# Altium PCB CW308T_ATSAML11.PcbDoc
Units mil, origin at the board's own origin, x right, y up, seen from the top; angles counter-clockwise.
Board outline 2055 x 2540 mil, 2 copper layers (Top Layer, Bottom Layer); 12 components, 19 nets, 118 pads, 67 vias.
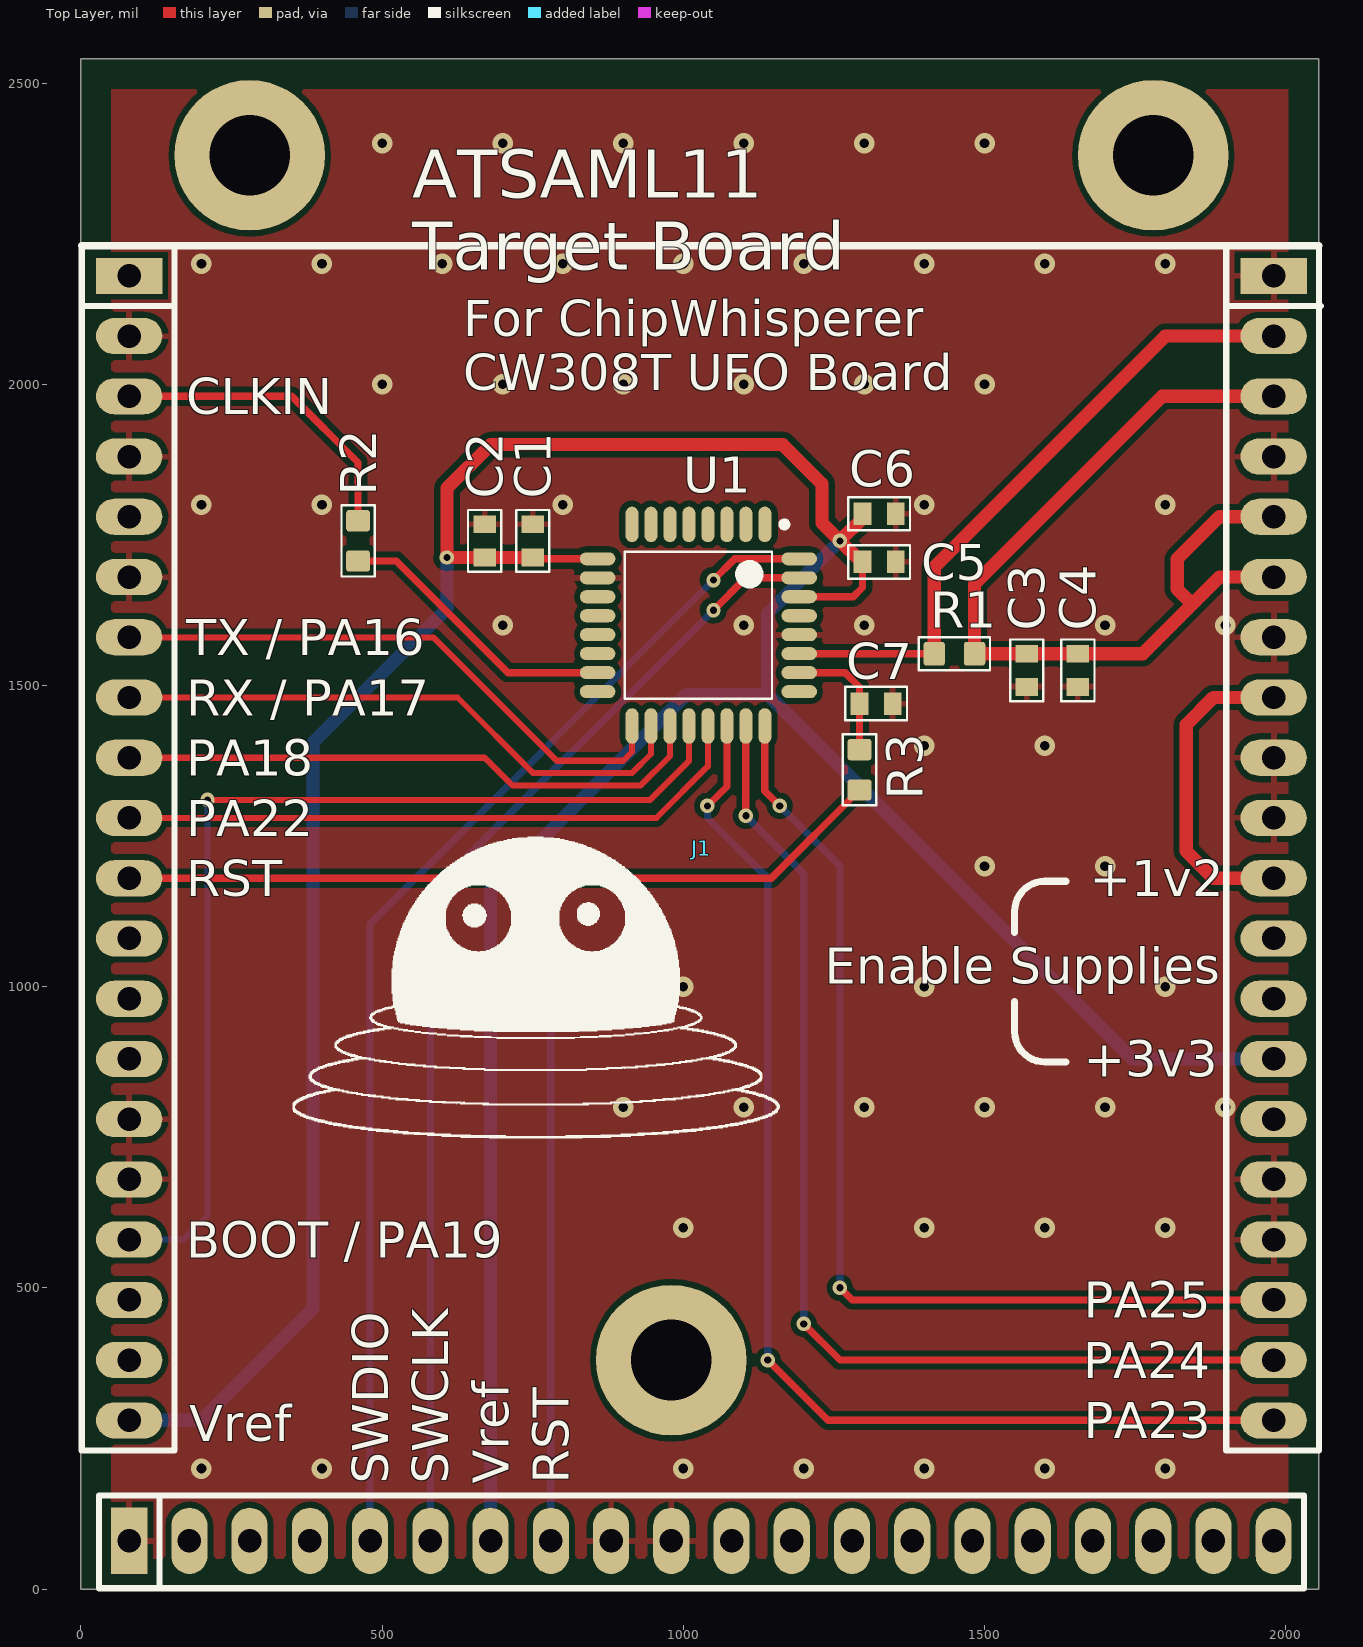
[diagram p0: Top Layer view]
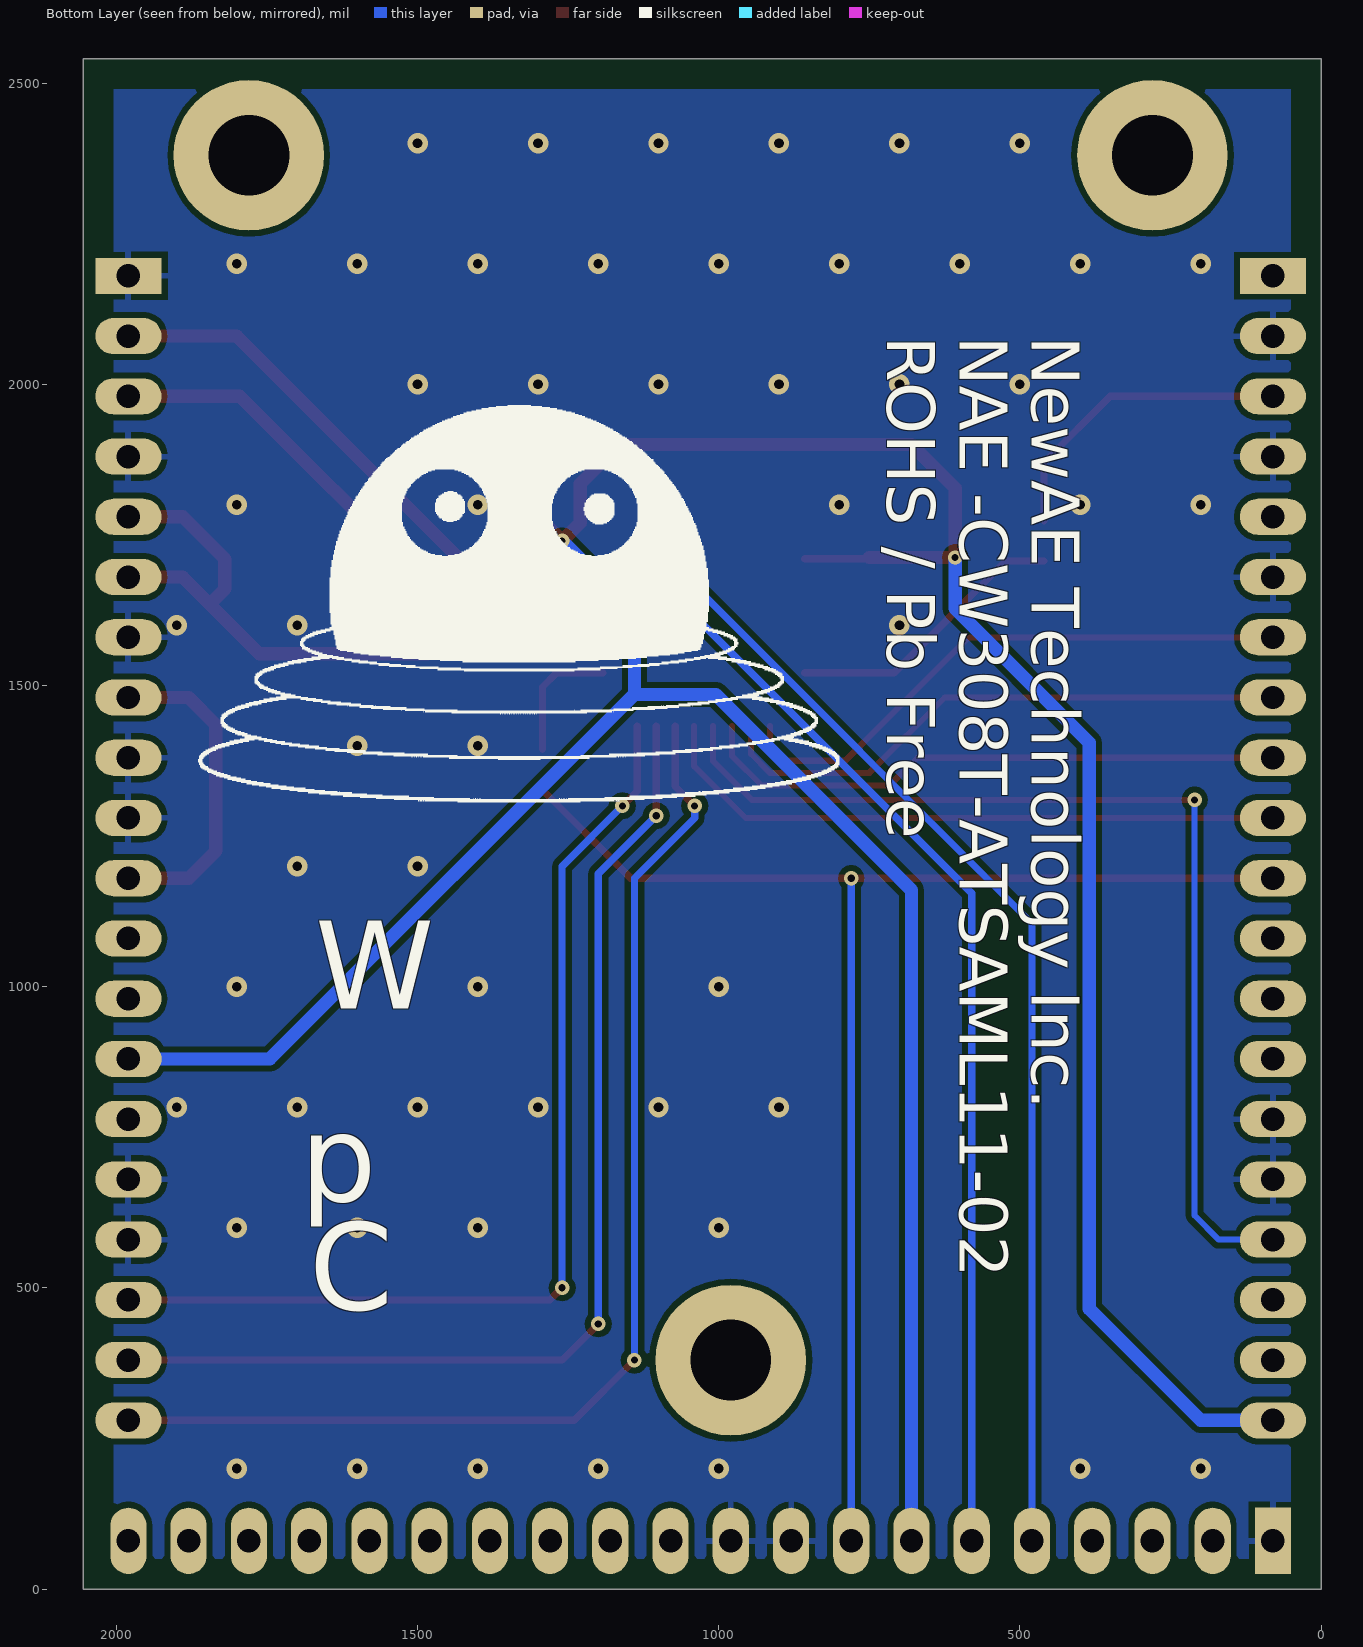
[diagram p1: Bottom Layer view, seen from below]

## Layer stack, top to bottom
Top Solder: solder mask 0.4, Solder Resist, Dk 3.5
Top Layer: signal copper 1.4
Dielectric 1: dielectric 12.6, FR-4, Dk 4.8
Bottom Layer: signal copper 1.4
Bottom Solder: solder mask 0.4, Solder Resist, Dk 3.5

## Board outline
0,0 0,2540 2055,2540 2055,0

## Design rules (kind name [scope] priority, off if disabled: settings)
BoardOutlineClearance Silk_to_Outline [(OnLayer('Top Overlay'))] p1: gap=0 ignorepadtopadclearanceinfootprint=FALSE
BoardOutlineClearance [All] p2: gap=50 ignorepadtopadclearanceinfootprint=FALSE
Clearance Clearance_Power [InNet('+*') OR InNet('-*') OR InNet('GND')] p1: gap=10 ignorepadtopadclearanceinfootprint=FALSE
Clearance [All] p2: gap=6 ignorepadtopadclearanceinfootprint=FALSE except(0: Arc-Hole Track-Hole SMDPad-Hole THPad-Hole Via-Hole Fill-Hole Poly-Hole Region-Hole Text-Hole)
HoleSize [All] p1: absolutevalues=TRUE maxlimit=200 minlimit=1 maxpercent=80.000 minpercent=20.000
MinimumSolderMaskSliver [All] p1: minsoldermaskwidth=5
PlaneConnect PlaneConnect_viaDirect [IsVia] p1: planeconnectstyle=Direct reliefexpansion=20 reliefentries=4 reliefconductorwidth=10 reliefairgap=10
PlaneConnect [All] p2: planeconnectstyle=Relief reliefexpansion=20 reliefentries=4 reliefconductorwidth=10 reliefairgap=10
PolygonConnect PolygonConnect_viaDirect [All vs isVia] p1: connectstyle=Direct reliefconductorwidth=10 reliefentries=4 polygonreliefangle="90 Angle" airgapwidth=10
PolygonConnect [All] p2: connectstyle=Relief reliefconductorwidth=10 reliefentries=4 polygonreliefangle="90 Angle" airgapwidth=10
RoutingVias [All] p1: holewidth=28 width=50 viastyle="Through Hole" minholewidth=28 minwidth=50 maxholewidth=28 maxwidth=50 useviatemplates=TRUE viatemplateguid#1={883BC67F-0BAB-4236-9748-A0FFC80E06F3} viatemplateguid#2={EC4B1443-3223-4F3C-BEE6-1F1A4B72CE8F} viatemplateguid#3={1AFF5C45-7DD9-4486-91C1-9BFD7A8408A9} viatemplatename#1=v61h30m0mx0 viatemplatename#2=v86h41m0mx0 viatemplatename#3=v127h71m0mx0
SilkToSilkClearance [All] p1: silktosilkclearance=5
SilkToSolderMaskClearance [IsPad] p1: minsilkscreentomaskgap=5 clearancetoexposedcopper=TRUE
SolderMaskExpansion [All] p1: expansion=4
Width [All] p1: maxlimit=100 minlimit=6 preferedwidth=8 minimp=50.000000 maximp=50.000000 favimp=50.000000
25 further rules are at their usual default settings.

## Components (designator, comment, footprint, x,y, rotation, side; value= is the part's Value field where it differs from the comment)
C1 "100n" CAPC0603_M 750,1740 r90 top
C2 "2u2" CAPC0603_M 670,1740 r90 top
C3 "100n" CAPC0603_M 1570,1525.2 r270 top
C4 "2u2" CAPC0603_M 1655,1525.2 r270 top
C5 "100n" CAPC0603_M 1325,1705 r0 top
C6 "2u2" CAPC0603_M 1325,1785 r0 top
C7 "DNM" CAPC0603_M 1320,1470 r0 top value=100n
J1 "CW308_TARGETCON" CW308_TBOARD_CONN 80,2180 r0 top locked
R1 "22R" RESC1608X55N 1450,1552.76 r0 top
R2 "22R" RESC1608X55N 460,1740 r90 top
R3 "22R" RESC1608X55N 1292.44,1360 r90 top
U1 "ATSAML11E16A-AU" TQFP80P900X900X120-32N 1025,1600 r270 top

## Footprints (in the part's own frame and the unit in brackets; to place one, negate y for a bottom-side part, rotate by r counter-clockwise, add the part's x,y. Pads: shape width x height; smd on the part's side, far side on the other; paste and mask are expansions set on the pad)
CAPC0603_M [mm]
  rect 0.75x0.95 smd: 1(-0.7,0) 2(0.7,0)
  silkscreen extent -1.3,-0.7 1.3,0.7, body extent -0.85,-0.45 0.85,0.45, height 0.9
CW308_TBOARD_CONN [mil]
  rect 110x60 hole 39: A1(0,0) C1(1900,0)
  oval 110x60 hole 39: A2(0,-100) A3(0,-200) A4(0,-300) A5(0,-400) A6(0,-500) A7(0,-600) A8(0,-700) A9(0,-800) A10(0,-900) A11(0,-1000) A12(0,-1100) A13(0,-1200) A14(0,-1300) A15(0,-1400) A16(0,-1500) A17(0,-1600) A18(0,-1700) A19(0,-1800) A20(0,-1900) C2(1900,-100) C3(1900,-200) C4(1900,-300) C5(1900,-400) C6(1900,-500) C7(1900,-600) C8(1900,-700) C9(1900,-800) C10(1900,-900) C11(1900,-1000) C12(1900,-1100) C13(1900,-1200) C14(1900,-1300) C15(1900,-1400) C16(1900,-1500) C17(1900,-1600) C18(1900,-1700) C19(1900,-1800) C20(1900,-1900)
  rect 60x110 hole 39: B1(0,-2100)
  oval 60x110 hole 39: B2(100,-2100) B3(200,-2100) B4(300,-2100) B5(400,-2100) B6(500,-2100) B7(600,-2100) B8(700,-2100) B9(800,-2100) B10(900,-2100) B11(1000,-2100) B12(1100,-2100) B13(1200,-2100) B14(1300,-2100) B15(1400,-2100) B16(1500,-2100) B17(1600,-2100) B18(1700,-2100) B19(1800,-2100) B20(1900,-2100)
  round 250 hole 134: MH1(200,200) MH2(900,-1800) MH2(1700,200)
  silkscreen extent -79,-2179 1979,50, body extent -50,-2149 1950,50, height 48
RESC1608X55N [mm] "Chip Resistor, Body 1.6x0.8mm, EIA 0603, IPC Medium Density"
  round 0.254 on Mech15: 0(0,0)
  rrect25% 0.9x1 smd: 1(-0.85,0) 2(0.85,0)
  Top Layer pour cut-out: -0.6,0.5 0.6,0.5 0.6,-0.5 -0.6,-0.5
  silkscreen extent -1.5,-0.7 1.5,0.7, body extent -0.87,-0.47 0.88,0.48, height 0.54
TQFP80P900X900X120-32N [mm] "TQFP, 32-Leads, Body 7.00x7.00mm, Pitch 0.80mm, IPC Medium Density"
  oval 1.5x0.55 smd: 1(-4.25,2.8) 2(-4.25,2) 3(-4.25,1.2) 4(-4.25,0.4) 5(-4.25,-0.4) 6(-4.25,-1.2) 7(-4.25,-2) 8(-4.25,-2.8) 17(4.25,-2.8) 18(4.25,-2) 19(4.25,-1.2) 20(4.25,-0.4) 21(4.25,0.4) 22(4.25,1.2) 23(4.25,2) 24(4.25,2.8)
  oval 0.55x1.5 smd: 9(-2.8,-4.25) 10(-2,-4.25) 11(-1.2,-4.25) 12(-0.4,-4.25) 13(0.4,-4.25) 14(1.2,-4.25) 15(2,-4.25) 16(2.8,-4.25) 25(2.8,4.25) 26(2,4.25) 27(1.2,4.25) 28(0.4,4.25) 29(-0.4,4.25) 30(-1.2,4.25) 31(-2,4.25) 32(-2.8,4.25)
  silkscreen extent -4.37,-3.1 3.1,3.75, body extent -4.5,-4.5 4.5,4.5, height 1.2

## Part data
C1 C3 C5: library part CCHIP-100n-0603, "100n, 0603", Case-EIA=0603, Case-Metric=1608, Manufacture 1=Kemet, Manufacture Part Number 1=C0603C104K5RACTU, Rated Voltage=50VDC, Supplier Part Number 1=399-5089-2-ND, Component Group=Capacitor, Component Type=Standard, Mounting Technology=SMT, Part Number=CCHIP-100n-0603, Pin Count=2, Supplier 1=Digi-Key
C2 C4 C6: library part CCHIP-2u2-0603, "2u2, 0603", Case-EIA=0603, Case-Metric=1608, Manufacture 1=Samsung, Manufacture Part Number 1=CL10B225KP8NNNC, Rated Voltage=10VDC, Supplier Part Number 1=1276-1134-2-ND, Component Group=Capacitor, Component Type=Standard, Mounting Technology=SMT, Part Number=CCHIP-2u2-0603, Pin Count=2, Supplier 1=Digi-Key
C7: library part CCHIP-100n-0603, Case-EIA=0603, Case-Metric=1608, Manufacture 1=Kemet, Manufacture Part Number 1=C0603C104K5RACTU, Rated Voltage=50VDC, Supplier Part Number 1=399-5089-2-ND, Component Group=Capacitor, Component Type=Standard, Mounting Technology=SMT, Part Number=CCHIP-100n-0603, Pin Count=2, Supplier 1=Digi-Key
J1: library part CW308_TBOARD, "CW308 \"Standard\" Target Board Connector", Component Group=Mechanical, Component Type=Standard, Mounting Technology=Through-hole, Part Number=CW308_TBOARD, Pin Count=60, Pitch=2.54mm
R1 R2 R3: library part RCHIP-22R-0603, "22R res, 0603, 1%, 1/10W", Case-EIA=0603, Case-Metric=1608, Manufacture 1=Yageo, Manufacture Part Number 1=RC0603FR-0722RL, Rated Power=0.1W, Rated Voltage=75VDC, Supplier Part Number 1=311-22.0HRCT-ND, Temperature Range="-55C to 155C", Tolerance=1%, Component Group=Resistor, Component Type=Standard, Mounting Technology=SMT, Part Number=RCHIP-22R-0603, Pin Count=2, Supplier 1=Digi-Key

## Via types
v1: diameter 34, hole 16, Top Layer to Bottom Layer, tented both sides, 55 vias
v2: diameter 24, hole 12, Top Layer to Bottom Layer, tented both sides, 7 vias
v3: diameter 24, hole 11.81, Top Layer to Bottom Layer, tented both sides, 5 vias

## Nets (pads, with @x,y where several pads share a name; then routed paths per layer and width w, separated by ;. In a path a pad name is that pad's centre, name@x,y a point inside that pad or via, vN(x,y) a via of type N, cw(c..) or ccw(c..) an arc to the next point about the centre after c; other vN are vias at no path point)
+1v2: J1.C8 J1.C11 | length 537.3
  Top Layer w22: J1.C11 1880,1180 1835,1225 1835,1435 1880,1480 J1.C8
+3v3: C1.1 C2.1 C5.1 C6.1 J1.A20 J1.B7 J1.C14 U1.9 U1.30 | length 6210.5
  Top Layer w12: C1.1 752.2,1710.24 U1.9 ; U1.30 1282.24,1647.24 1297.44,1662.44 C5.1
  Top Layer w22: C1.1 C2.1 v3(607.56,1712.44) 607.56,1827.56 680,1900 1165,1900 1230,1835 1230,1770 v2(1260,1740) ; C5.1 1295,1705 v2(1260,1740) ; C6.1 1297.44,1777.44 v2(1260,1740)
  Bottom Layer w22: J1.A20 200,280 385,465 385,1405 607.56,1627.56 v3(607.56,1712.44) ; J1.B7 680,1160 1005,1485 1140,1485 ; v2(1260,1740) 1140,1620 1140,1485 ; J1.C14 1745,880 1140,1485
ENTRY: J1.A17 U1.20 | length 1720.9
  Top Layer w10: v2(210,1310) 945,1310 1009.25,1374.25 U1.20
  Bottom Layer w10: J1.A17 170,580 210,620 v2(210,1310)
GND: C1.2 C2.2 C3.2 C4.2 C5.2 C6.2 C7.2 J1.A2 J1.A4 J1.A6 J1.A15 J1.A16 J1.B1 J1.B9 J1.B10 J1.C1 J1.C4 J1.C7 J1.C9 J1.C10 J1.C16 J1.C17 U1.10 U1.28
  other v1: 200,200 400,200 1000,200 1200,200 1400,200 1600,200 1800,200 1000,600 1400,600 1600,600 1800,600 900,800 1100,800 1300,800 1500,800 1700,800 1900,800 1000,1000 1400,1000 1800,1000 1500,1200 1700,1200 1400,1400 1600,1400 700,1600 1100,1600 1300,1600 1700,1600 1900,1600 200,1800 400,1800 800,1800 1400,1800 1800,1800 500,2000 700,2000 900,2000 1100,2000 1300,2000 1500,2000 200,2200 400,2200 600,2200 800,2200 1000,2200 1200,2200 1400,2200 1600,2200 1800,2200 500,2400 700,2400 900,2400 1100,2400 1300,2400 1500,2400
GPIO3: J1.A9 U1.19 | length 986.9
  Top Layer w10: J1.A9 670,1380 716,1334 929,1334 977.76,1382.76 U1.19
GPIO4: J1.A10 U1.21 | length 1063.2
  Top Layer w10: J1.A10 955,1280 1040.75,1365.75 U1.21
LED1: J1.C18 U1.24 | length 1712.6
  Top Layer w12: U1.24 1135.24,1324.76 v3(1160,1300) ; v2(1260,500) 1280,480 J1.C18
  Bottom Layer w12: v3(1160,1300) 1260,1200 v2(1260,500)
LED2: J1.C19 U1.23 | length 1835.6
  Top Layer w12: v3@1100,1280 v3(1103.74,1283.74) U1.23 ; v2(1200,440) 1260,380 J1.C19
  Bottom Layer w12: v3@1108.74,1278.74 1200,1187.48 v2(1200,440)
LED3: J1.C20 U1.22 | length 1988.9
  Top Layer w12: v3(1040,1300) 1072.24,1332.24 U1.22 ; v2(1140,380) 1240,280 J1.C20
  Bottom Layer w12: v3(1040,1300) 1040,1280 1140,1180 v2(1140,380)
NetC7_1: C7.1 R3.2 U1.26 | length 214
  Top Layer w12: U1.26 1268.74,1521.26 1292.44,1497.56 C7.1 R3.2
NetJ1_A3: J1.A3 R2.2 | length 522.1
  Top Layer w12: J1.A3 350,1980 460,1870 R2.2
RST: J1.A11 J1.B8 R3.1 | length 2373.1
  Top Layer w12: J1.A11 1145.91,1180 R3.1
  Bottom Layer w12: J1.B8 v3(780,1180)
RX: J1.A8 U1.18 | length 977.4
  Top Layer w10: J1.A8 625,1480 750,1355 915,1355 946.26,1386.26 U1.18
SHUNTH: C3.1 C4.1 J1.C3 J1.C5 J1.C6 R1.2 | length 1564.9
  Top Layer w22: J1.C6 1890,1680 1845,1635 ; J1.C5 1890,1780 1820,1710 1820,1660 1845,1635 ; J1.C3 1795,1980 1483.46,1668.46 R1.2 C3.1 C4.1 1762.76,1552.76 1845,1635
SWCLK: J1.B6 U1.31 | length 1904.3
  Top Layer w12: v2(1050,1625) 1103.74,1678.74 U1.31
  Bottom Layer w12: J1.B6 580,1155 v2(1050,1625)
SWDIO: J1.B5 U1.32 | length 1988
  Top Layer w12: v2(1050,1675) 1085.24,1710.24 U1.32
  Bottom Layer w12: J1.B5 480,1105 v2(1050,1675)
TX: J1.A7 U1.17 | length 968.7
  Top Layer w10: J1.A7 585,1580 790,1375 900,1375 914.76,1389.76 U1.17
VDDCORE: J1.C2 R1.1 U1.27 | length 1090.3
  Top Layer w12: U1.27 R1.1
  Top Layer w22: R1.1 1416.54,1696.54 1800,2080 J1.C2
XIN: R2.1 U1.15 | length 474.4
  Top Layer w12: R2.1 523.46,1706.54 708.74,1521.26 U1.15
pads on no net: J1.A1 J1.A5 J1.A12 J1.A13 J1.A14 J1.A18 J1.A19 J1.B2 J1.B3 J1.B4 J1.B11 J1.B12 J1.B13 J1.B14 J1.B15 J1.B16 J1.B17 J1.B18 J1.B19 J1.B20 J1.C12 J1.C13 J1.C15 J1.MH1 J1.MH2 R1.0 R2.0 R3.0 U1.1 U1.2 U1.3 U1.4 U1.5 U1.6 U1.7 U1.8 U1.11 U1.12 U1.13 U1.14 U1.16 U1.25 U1.29

## Polygon pours and split planes (outlines as drawn)
GND on Bottom Layer "GND_L02_P004" (solid, remove dead copper, pour order 4): -2,2539 2050,2539 2050,0 0,0
GND on Top Layer "GND_L01_P002" (solid, remove dead copper, pour order 2): -3,2540 2056,2540 2056,1 2055,0 0,0

## Silkscreen, mask and mechanical layers (free items; w line width, h text height)
Top Overlay:
  drawing of 10 lines, arcs and shapes, not listed
  text "ATSAML11  / Target Board" at 550,2190 h80
  text "For ChipWhisperer / CW308T UFO Board" at 635,1990 h60
  text "CLKIN" at 175,1950 h60
  text "TX / PA16" at 175,1550 h60
  text "RX / PA17" at 175,1450 h60
  text "PA18" at 175,1350 h60
  text "PA22" at 175,1250 h60
  text "RST" at 175,1150 h60
  text "+1v2" at 1675,1150 h60
  text "Enable Supplies" at 1235,1005 h60
  text "+3v3" at 1665,850 h60
  text "BOOT / PA19" at 175,550 h60
  text "PA25" at 1665,450 h60
  text "PA24" at 1663.57,350 h60
  text "PA23" at 1665,250 h60
  text "Vref" at 180,245 h60
  text "SWDIO" at 510,175 h60 r90
  text "SWCLK" at 610,175 h60 r90
  text "Vref" at 710,175 h60 r90
  text "RST" at 810,175 h60 r90
Bottom Overlay:
  drawing of 3 lines, arcs and shapes, not listed
  text "NewAE Technology Inc. / NAE -CW308T-ATSAML11-02 / ROHS / Pb Free" at 720,2080 h80 r90
  text "W" at 1670,915 h250
  text "p" at 1695,595 h250
  text "C" at 1680,415 h250
Mechanical 1:
  the board outline again, w11.81